# Altium PCB TNY275_V1.PcbDoc
Units mm, origin at the board's own origin, x right, y up, seen from the top; angles counter-clockwise.
Board outline 34 x 22 mm, 2 copper layers (Top Layer, Bottom Layer); 25 components, 17 nets, 67 pads, 3 vias.
Unrouted connection lines stored in the file: 4.
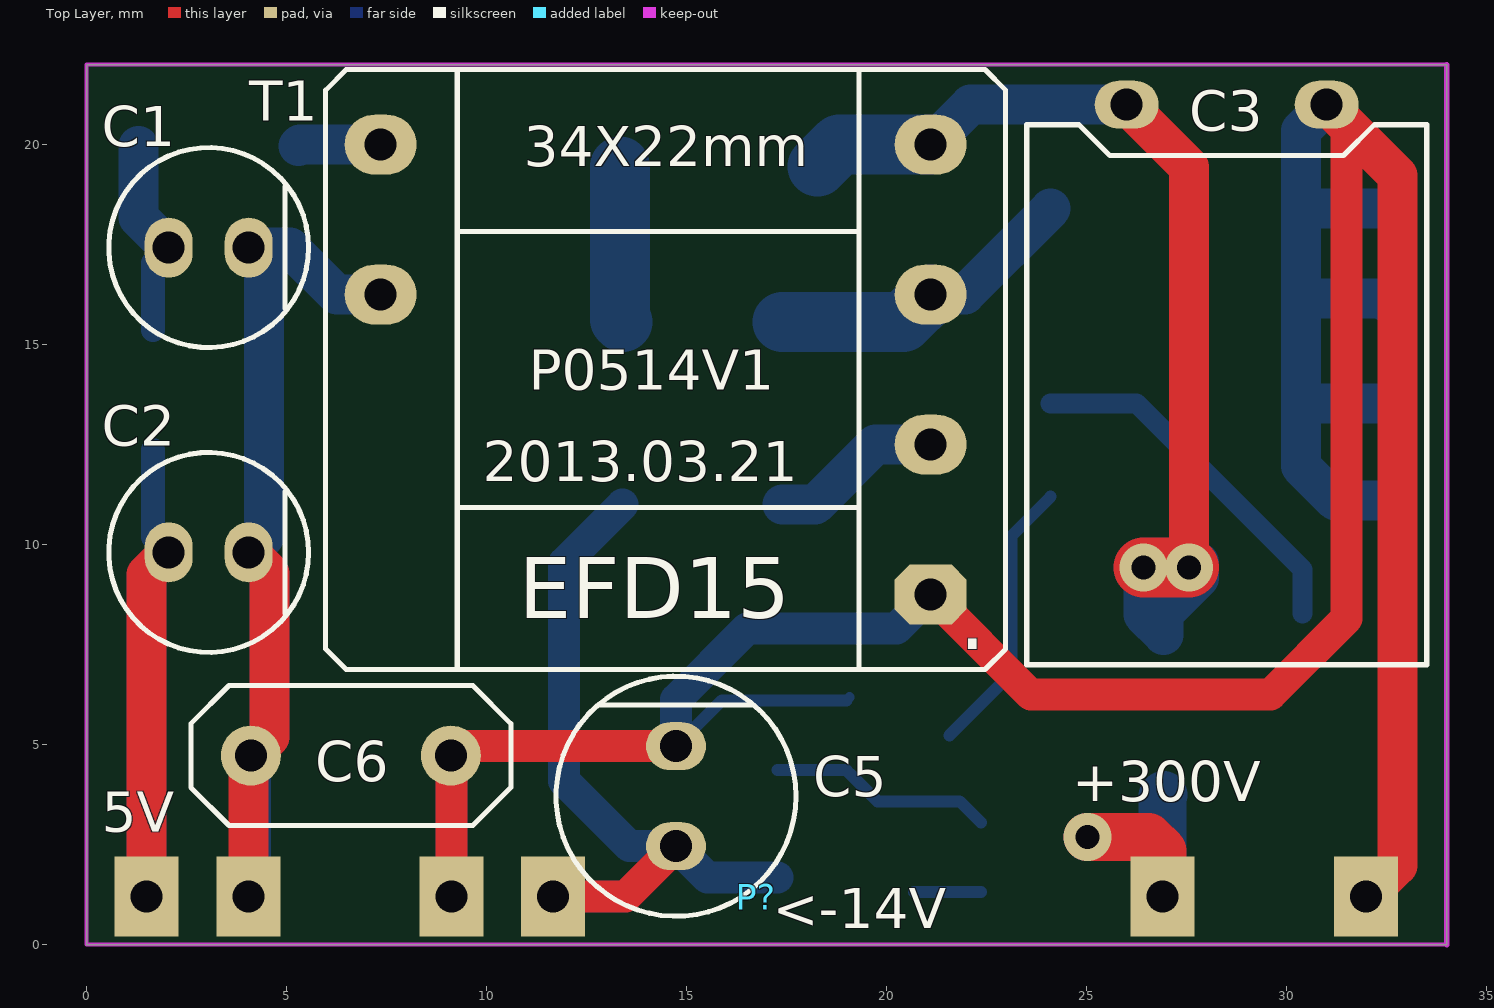
[diagram p0: Top Layer view]
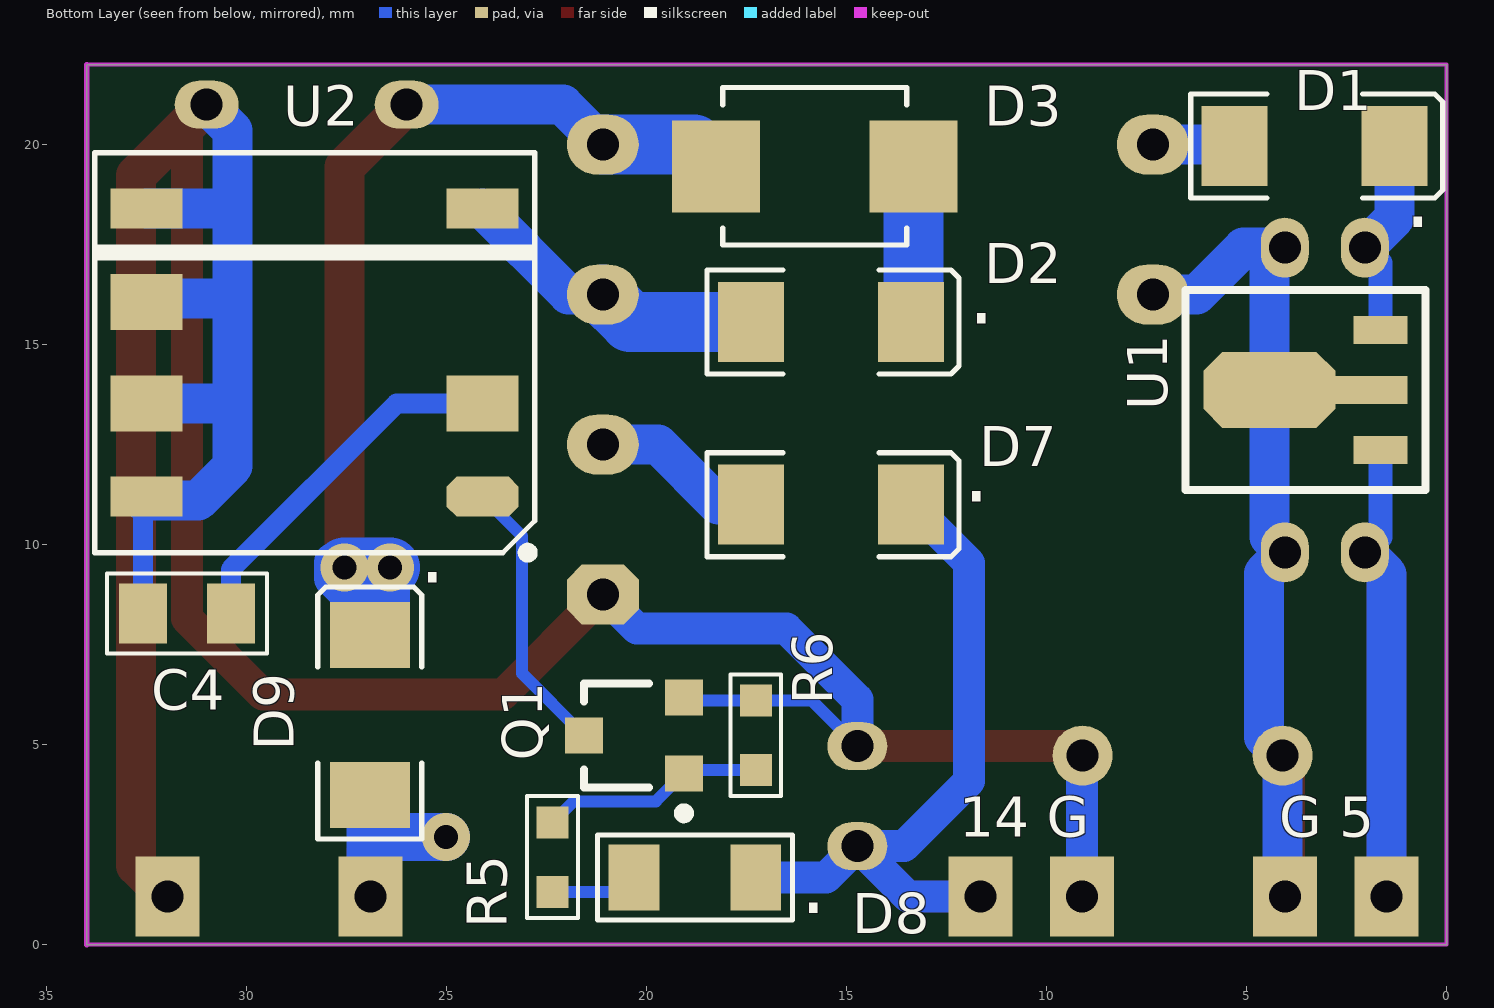
[diagram p1: Bottom Layer view, seen from below]

## Layer stack, top to bottom
Top Layer: signal copper 0.0356
Dielectric: dielectric 0.32, FR-4, Dk 4.8
Bottom Layer: signal copper 0.0356

## Board outline
0,0 34,0 34,22 0,22

## Design rules (kind name [scope] priority, off if disabled: settings)
Clearance [All] p1: gap=0.2
ComponentClearance [All] p1: gap=0 collisioncheckmode=3 verticalgap=0 showdistances=FALSE
Height [All] p1: minheight=0 maxheight=30 prefheight=12.7
HoleSize [All] p1: absolutevalues=TRUE maxlimit=10 minlimit=0.025 maxpercent=80.000 minpercent=20.000
HoleToHoleClearance [All] p1: gap=0.2 allowstackedmicrovias=TRUE
MinimumSolderMaskSliver [All] p1 off: minsoldermaskwidth=0.2
PolygonConnect [All] p1: connectstyle=Relief reliefconductorwidth=0.254 reliefentries=4 polygonreliefangle="90 Angle"
RoutingVias [All] p1: holewidth=0.8 width=1.27 viastyle="Through Hole" minholewidth=0.5 minwidth=1 maxholewidth=5 maxwidth=10
SilkToSilkClearance [All] p1 off: silktosilkclearance=0.254
SilkscreenOverComponentPads [All] p1 off: minsilkscreentomaskgap=0.254
SolderMaskExpansion [All] p1: expansion=0.102
TestPointUsage [All] p1: valid=0 allowmultiple=FALSE
Testpoint [All] p1: side=15 testpointundercomponent=TRUE minsize=1.016 maxsize=2.54 preferedsize=1.524 minholesize=0 maxholesize=1.016 preferedholesize=0.813 testpointgrid=0.025 style=1021 order=0123456789
Width [All] p1: maxlimit=10 minlimit=0.254 preferedwidth=0.254
17 further rules are at their usual default settings.

## Components (designator, comment, footprint, x,y, rotation, side; value= is the part's Value field where it differs from the comment)
C1 "Cap Pol1" C-5*7 3.048,17.428 r0 top
C2 "Cap Pol1" C-5*7 3.048,9.808 r0 top
C3 "Cap Pol1" "C-10 卧式" 28.5,21 r0 top
C4 "Cap" 0805 31.496,8.284 r90 bottom
C5 "Cap Pol1" 电解电容6*11mm-脚距2.5mm 14.732,3.712 r90 top
C6 "Y电容" 07D471K 6.604,4.728 r180 top
D1 "US1J" SMA 3.3,19.968 r180 bottom
D2 "US1J" SMA 15.392,15.569 r180 bottom
D3 "P6KE200" SMBJ 15.8,19.46 r180 bottom
D5 "14V" 1206 54.991,-15.465 r90 top
D6 "4148" 1206 57.582,-15.338 r90 top
D7 "US1J" SMA 15.392,11 r180 bottom
D8 "14V" 1206 18.796,1.68 r180 bottom
D9 "US1J" SMA 26.924,5.744 r90 bottom
P? "Header 13" 2.54引脚 1.5,1.2 r0 top
Q1 "8050" sot-23 20.32,5.236 r90 bottom
R1 "Res1" 1206 51.689,-22.831 r90 top
R2 "Res1" 1206 57.277,-22.831 r90 top
R3 "Res1" 0805 51.308,-16.1 r0 top
R4 "Res1" 0805 48.768,-16.1 r0 top
R5 "Res1" 0603 22.352,2.188 r0 bottom
R6 "Res1" 0603 17.272,5.236 r0 bottom
T1 "EFD15" EFD15_DIP8 14.224,14.38 r90 top
U1 "MC78L05ACPRP" SOT89 3.048,13.872 r90 bottom
U2 "TNY275" TNY275_SMD 28.3,14.8 r0 bottom

## Footprints (in the part's own frame and the unit in brackets; to place one, negate y for a bottom-side part, rotate by r counter-clockwise, add the part's x,y. Pads: shape width x height; smd on the part's side, far side on the other; paste and mask are expansions set on the pad)
2.54引脚 [mm]
  rect 1.6x2 hole 0.8: 1(0,0) 2(2.54,0) 4(7.62,0) 5(10.16,0) 11(25.4,0) 13(30.48,0)
07D471K [mm]
  round 1.5 hole 0.8: 1(-2.5,0) 2(2.5,0)
  silkscreen extent -4,-1.75 4,1.75
0603 [mm]
  rect 0.8x0.8 smd: 1(0,0.87) 2(0,-0.87)
  silkscreen extent -0.64,-1.52 0.64,1.52
0805 [mm]
  rect 1.5x1.2 smd: 1(0,1.1) 2(0,-1.1)
  silkscreen extent -1,-2 1,2
1206 [mil]
  rect 50x65 smd: 1(-60,0) 2(60,0)
  silkscreen extent -96,-42 96,42
C-5*7 [mm]
  oval 1.2x1.5 hole 0.8: 1(-1,0) 2(1,0)
  silkscreen extent -2.5,-2.5 2.5,2.5
"C-10 卧式" [mm]
  oval 1.6x1.2 hole 0.8: 1(-2.5,0) 2(2.5,0)
  silkscreen extent -5,-14 5,-0.5
EFD15_DIP8 [mm]
  oct 1.5x1.8 hole 0.8: 1(-5.625,-6.875)
  oval 1.5x1.8 hole 0.8: 2(-1.875,-6.875) 3(1.875,-6.875) 4(5.625,-6.875) 5(5.625,6.875) 6(1.875,6.875)
  silkscreen extent -7.5,-8.75 7.5,8.25
SMA [mm]
  rect 1.65x2 smd: 1(-2,0) 2(2,0)
  silkscreen extent -3.1,-1.3 3.2,1.3
SMBJ [mm]
  rect 2.2x2.3 smd: 1(-2.47,0) 2(2.47,0)
  round 0.5 on Bottom Overlay: 3(4.37,-0.127)
  silkscreen extent -2.3,-1.97 2.3,1.97
SOT89 [mm] "SOT-89; Body 4.6 x 4.25 mm, inc. leads (LxW max)"
  oct 1.9x3.3 smd: 0(0,1.388)
  rect 0.7x1.35 smd: 1(-1.5,-1.388) 3(1.5,-1.388)
  rect 0.7x1.8 smd: 2(0,-1.162)
  silkscreen extent -2.5,-2.51 2.5,3.49
sot-23 [mm] "SOT-23; 3 Leads; Body 3.0 x 2.6 mm, inc. leads (LxW max)"
  rect 0.9x0.95 smd: 1(-0.95,-1.25) 2(0.95,-1.25) 3(0,1.25)
  silkscreen extent -2.07,-1.37 1.3,1.25
TNY275_SMD [mm]
  oct 1.8x1 smd: 1(-4.2,3.6)
  rect 1.8x1.4 smd: 2(-4.2,1.27) 6(4.2,-1.27) 7(4.2,1.27)
  rect 1.8x1 smd: 4(-4.2,-3.6) 5(4.2,-3.6) 8(4.2,3.6)
  silkscreen extent -5.5,-5 5.5,5.12
电解电容6*11mm-脚距2.5mm [mm]
  oval 1.2x1.5 hole 0.8: 1(-1.25,0) 2(1.25,0)
  silkscreen extent -3,-3 3,3

## Part data
C1 C2 C3 C5: "Polarized Capacitor (Radial)"
C4: "Capacitor"
C6: library part Cap, "Capacitor"
D1 D6 D7: library part "Diode 1N4007", "1 Amp General Purpose Rectifier"
D2 D3 D9: library part Diode, "Default Diode"
D5 D8: library part "D Zener", "Zener Diode"
P?: "Header, 13-Pin"
Q1: library part NPN, "NPN Bipolar Transistor"
R1 R2 R3 R4 R5 R6: "Resistor"
U1: "Three-Terminal Low Current Positive Voltage Regulator"

## Via types
v1: diameter 1.2, hole 0.6, Top Layer to Bottom Layer, 3 vias

## Nets (pads, with @x,y where several pads share a name; then routed paths per layer and width w, separated by ;. In a path a pad name is that pad's centre, name@x,y a point inside that pad or via, vN(x,y) a via of type N, cw(c..) or ccw(c..) an arc to the next point about the centre after c; other vN are vias at no path point)
5V: C2.1 P?.1 U1.1 | length 20.4
  Top Layer w1: P?.1 1.5,9.26 C2.1
  Bottom Layer w0.6: U1.1 1.66,10.195 C2.1
  Bottom Layer w1: P?.1 1.5,9.26 C2.1
5V_GND: C1.2 C2.2 C6.2 P?.2 T1.6 U1.0 U1.2 | length 29.8
  Top Layer w1: P?.2 4.04,4.664 4.572,5.196 4.572,9.284 C2.2
  Bottom Layer w1: P?.2 4.104,1.264 C6.2 4.572,5.196 4.572,9.284 C2.2 4.436,10.195 U1.0 4.436,17.04 C1.2 5.08,17.428 6.253,16.255 T1.6
14V: C5.1 D7.2 D8.2 P?.5 | length 21.4
  Top Layer w0.8: P?.5 13.47,1.2 C5.1
  Bottom Layer w0.8: P?.5@11.938,1.478 P?.5 13.47,1.2 C5.1 ; D7.2 11.938,9.546 11.938,4.093 13.569,2.462 C5.1 ; D8.2 15.514,1.68 C5.1
300V: D9.1 P?.11 | length 9.1
  Top Layer w1.2: v1(25.019,2.696) 26.543,2.696 26.9,2.339 P?.11
  Bottom Layer w1.2: v1(25.019,2.696) 26.9,2.696 P?.11 26.9,3.72 D9.1
GND: C3.2 C4.1 C5.2 C6.1 P?.4 P?.13 Q1.2 R6.2 T1.1 U2.5 U2.6 U2.7 U2.8 | length 93.6
  Top Layer w0.8: P?.4 9.12,4.712 C6.1 9.338,4.962 C5.2 ; T1.1 23.602,6.252 29.591,6.252 31.496,8.157 31.496,20.504 C3.2
  Top Layer w1: C3.2 32.766,19.234 32.766,1.986 P?.13
  Bottom Layer w0.254: Q1.2@18.99,6.106 Q1.2
  Bottom Layer w0.3: C5.2 15.876,6.106 R6.2 Q1.2@18.99,6.106
  Bottom Layer w0.5: C4.1 U2.8@32.596,11.104
  Bottom Layer w0.8: C6.1 9.12,4.712 P?.4 ; C5.2 14.732,6.125 16.51,7.903 20.247,7.903 T1.1
  Bottom Layer w1: C3.2 30.353,20.353 30.353,18.317 ; U2.7 30.392,13.53 30.353,13.491 ; U2.6 32.412,16.158 30.353,16.158 ; U2.5 30.436,18.4 30.353,18.317 ; U2.8@32.596,11.104 31.216,11.104 30.353,11.967 30.353,13.491 ; 30.353,13.491 30.353,16.158 ; 30.353,16.158 30.353,18.317
NetC1_1: C1.1 D1.2 U1.3 | length 5.1
  Bottom Layer w0.6: U1.3 1.66,17.04 C1.1
  Bottom Layer w1: D1.2 1.3,18.176 C1.1
NetC3_1: C3.1 D3.1 D9.2 T1.4 | length 26.9
  Top Layer w1: C3.1 27.559,19.441 v1(27.559,9.427)
  Top Layer w1.5: v1(26.416,9.427) v1(27.559,9.427)
  Bottom Layer w1: T1.4 22.094,21 C3.1 ; v1(26.416,9.427) 26.416,8.252 D9.2 26.924,8.284 27.813,9.173 v1@27.813,9.554
  Bottom Layer w1.5: D3.1 18.815,20.005 T1.4 ; v1(26.416,9.427) v1(27.559,9.427)
NetC4_2: C4.2 U2.2 | length 9.1
  Bottom Layer w0.5: U2.2 26.25,13.53 30.396,9.384 C4.2
NetD1_1: D1.1 T1.5 | length 2.1
  Bottom Layer w1: D1.1 5.337,20.005 T1.5
NetD2_1: D2.1 T1.3 U2.4 | length 7.9
  Bottom Layer w1: T1.3 21.955,16.255 U2.4
  Bottom Layer w1.5: D2.1 20.413,15.569 T1.3
NetD2_2: D2.2 D3.2 | length 3.9
  Bottom Layer w1.5: D3.2 13.33,15.631 D2.2
NetD5_2: D5.2 R3.1 R4.1
NetD6_2: D6.2 R3.2
NetD7_1: D7.1 T1.2 | length 4.3
  Bottom Layer w1: D7.1 18.21,11 19.715,12.505 T1.2
NetD8_1: D8.1 R5.1 | length 1.7
  Bottom Layer w0.3: D8.1@20.682,1.318 R5.1
NetQ1_1: Q1.1 R5.2 R6.1 | length 5.5
  Bottom Layer w0.3: R6.1 Q1.1@18.99,4.366 ; Q1.1 19.771,3.585 21.825,3.585 R5.2
NetQ1_3: Q1.3 U2.1 | length 7
  Bottom Layer w0.3: Q1.3 23.114,6.78 23.114,10.214 U2.1
pads on no net: D3.3 D5.1 D6.1 R1.1 R1.2 R2.1 R2.2 R4.2

## Keep-outs
Keep-Out Layer:
  the board outline again, w0.1

## Silkscreen, mask and mechanical layers (free items; w line width, h text height)
Top Overlay:
  text "34X22mm" at 10.922,19.46 h1
  text "P0514V1" at 11.049,13.872 h1
  text "2013.03.21" at 9.906,11.586 h1
  text "+300V" at 24.638,3.585 h1
  text "5V" at 0.381,2.823 h1
  text "<-14V" at 17.145,0.41 h1
Bottom Overlay:
  text "." at 0.381,17.936 h1.52
  text "." at 11.303,15.523 h1.52
  text "." at 11.43,11.078 h1.52
  text "." at 25.019,9.046 h1.52
  text "G 5" at 4.191,2.696 h1
  text "14 G" at 12.192,2.696 h1
  text "." at 15.494,0.791 h1.52